# Altium PCB pilotage moteur.PcbDoc
Units mil, origin at the board's own origin, x right, y up, seen from the top; angles counter-clockwise.
Board outline 2030 x 2485 mil, 2 copper layers (Top Layer, Bottom Layer); 17 components, 12 nets, 47 pads, 3 vias.
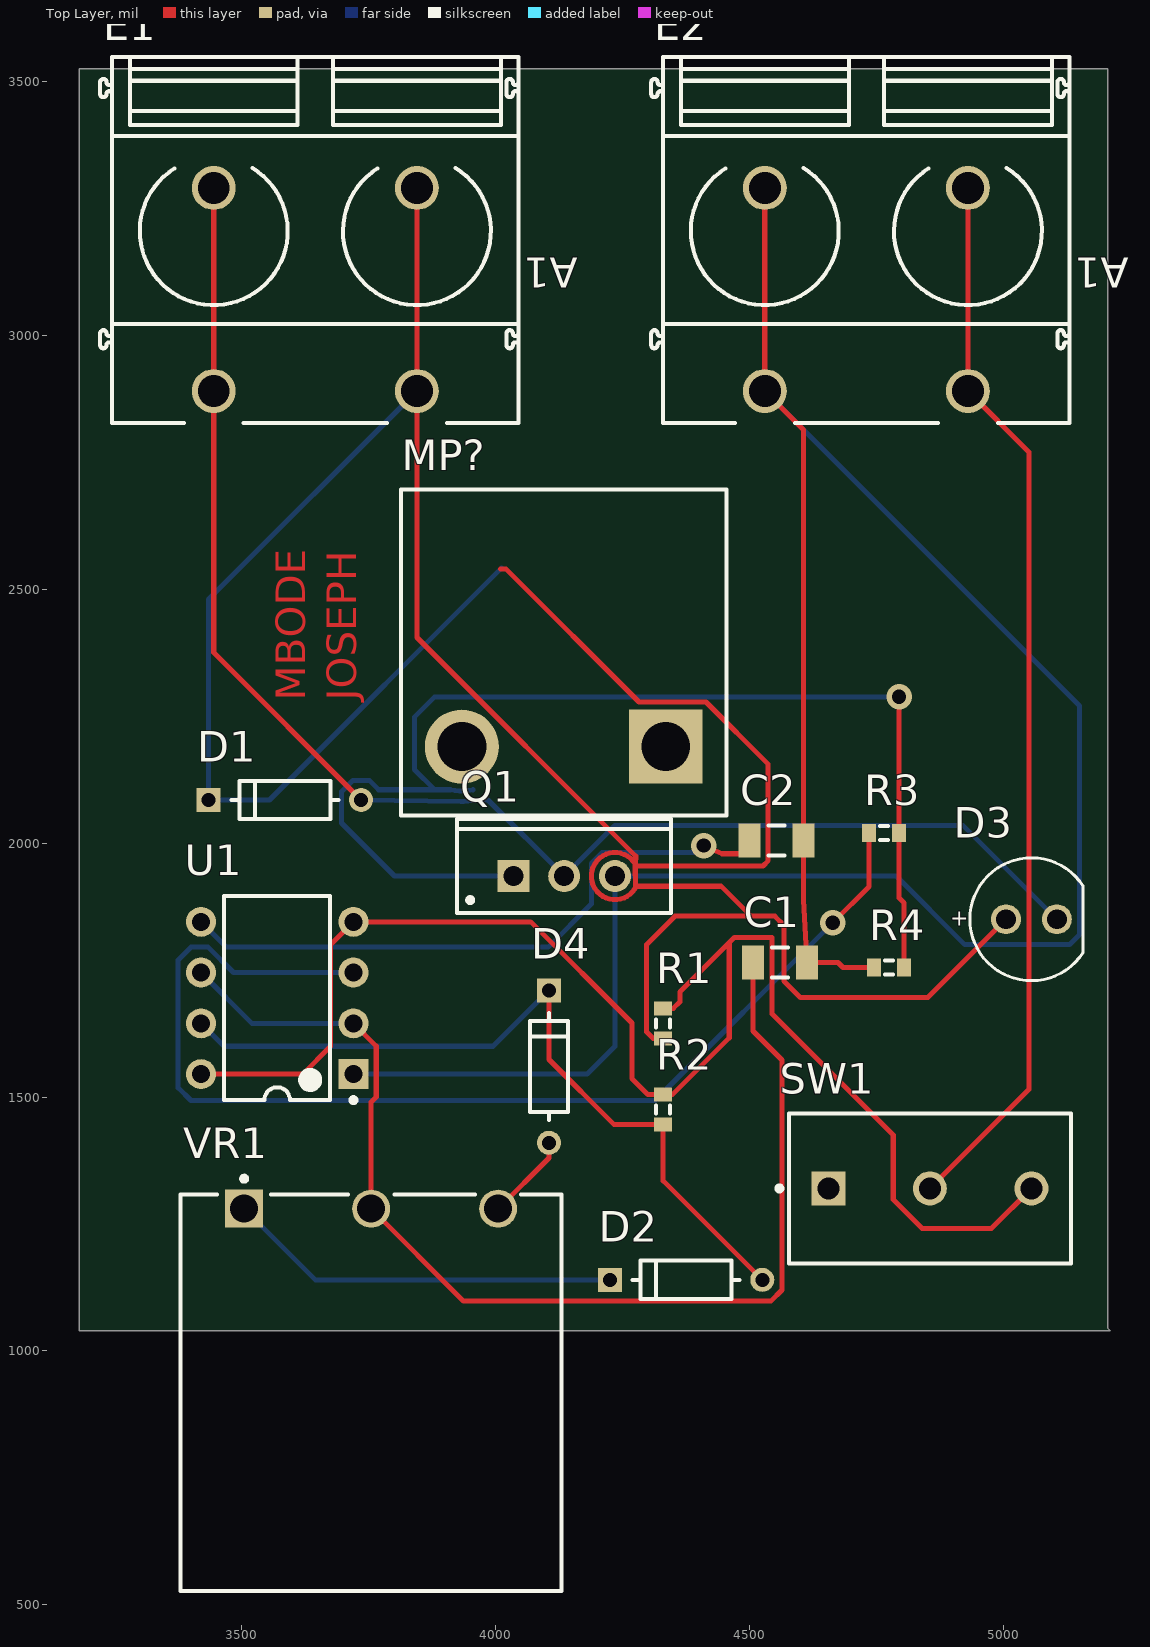
[diagram p0: Top Layer view]
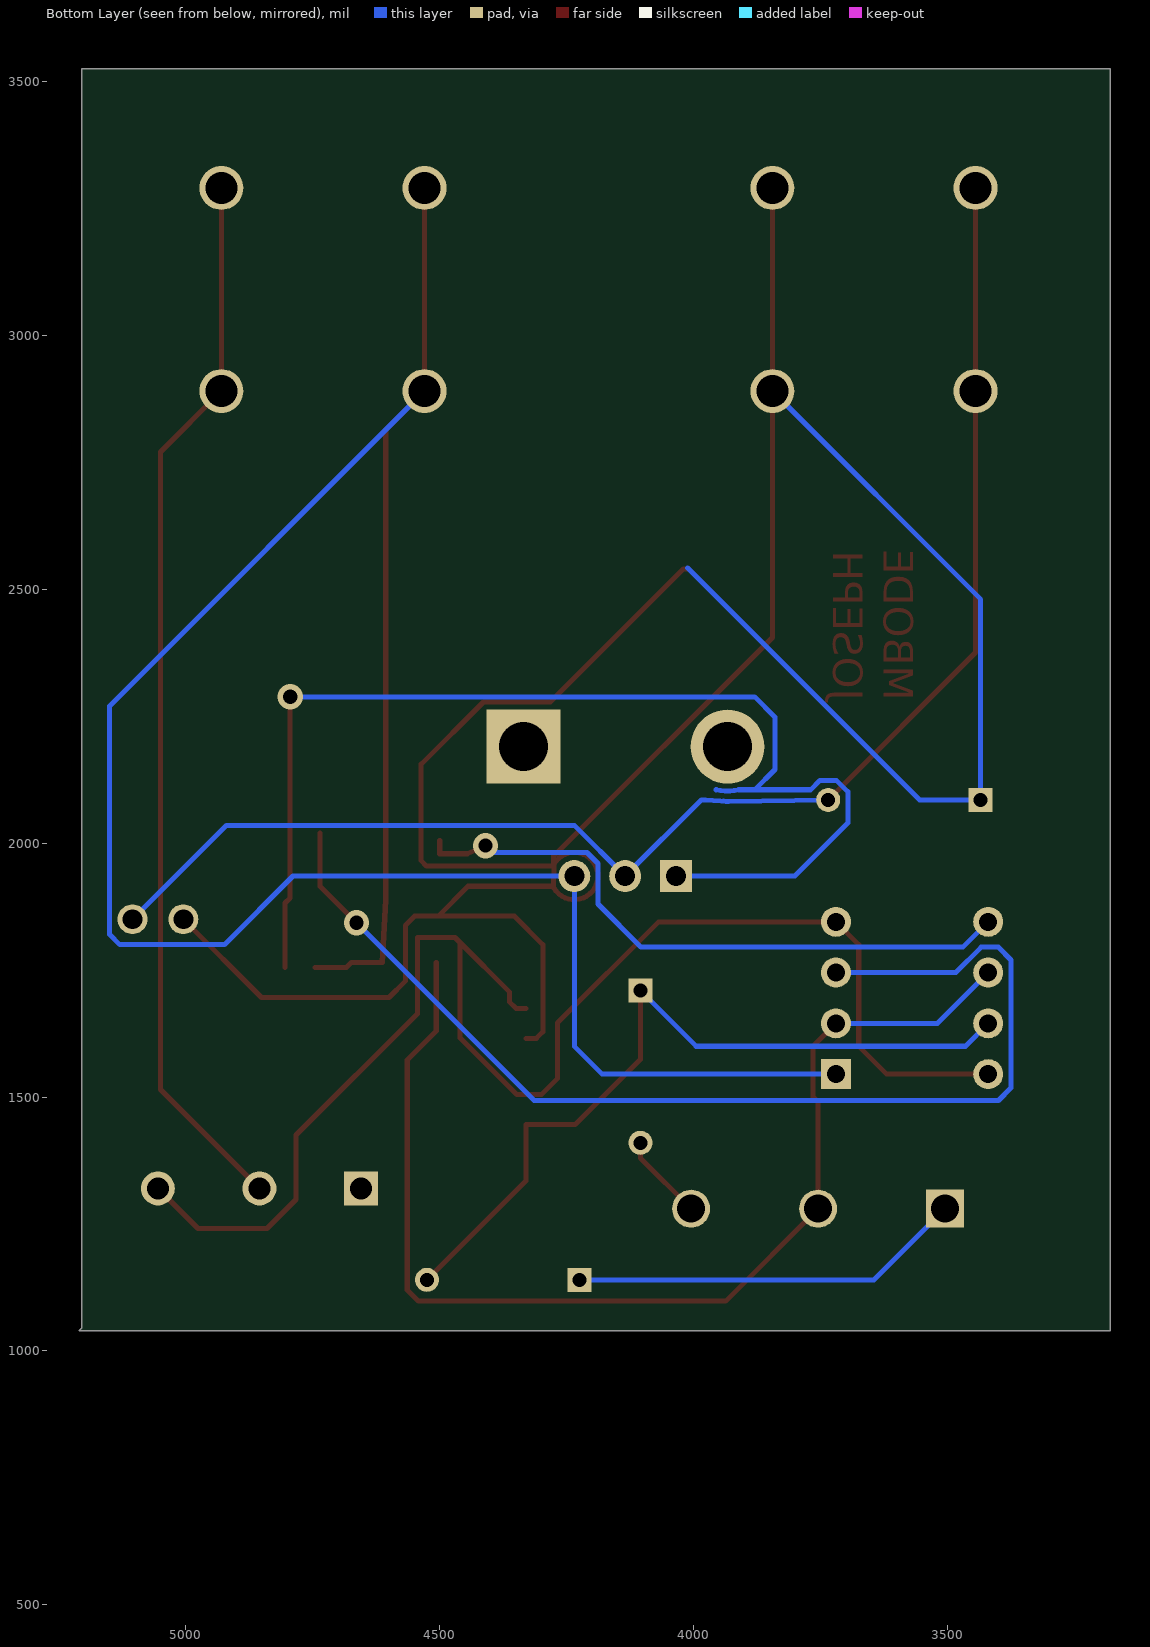
[diagram p1: Bottom Layer view, seen from below]

## Layer stack, top to bottom
Top Solder: solder mask 0.4, Solder Resist, Dk 3.5
Top Layer: signal copper 1.4
Dielectric 1: dielectric 12.6, FR-4, Dk 4.8
Bottom Layer: signal copper 1.4
Bottom Solder: solder mask 0.4, Solder Resist, Dk 3.5

## Board outline
3180,3525 5205,3525 5205,1045 5210,1040 3180,1040

## Design rules (kind name [scope] priority, off if disabled: settings)
Clearance [All] p1: gap=10 ignorepadtopadclearanceinfootprint=FALSE except(0: Arc-Hole Track-Hole SMDPad-Hole THPad-Hole Via-Hole Fill-Hole Poly-Hole Region-Hole Text-Hole)
PolygonConnect [All] p1: connectstyle=Relief reliefconductorwidth=10 reliefentries=4 polygonreliefangle="90 Angle" airgapwidth=10
RoutingVias [All] p1: holewidth=28 width=50 viastyle="Through Hole" minholewidth=28 minwidth=50 maxholewidth=28 maxwidth=50
SolderMaskExpansion [All] p1: expansion=4 istentingtop=FALSE
Width [All] p1: maxlimit=10 minlimit=10 preferedwidth=10
30 further rules are at their usual default settings.

## Components (designator, comment, footprint, x,y, rotation, side; value= is the part's Value field where it differs from the comment)
C1 "Cap Semi" C1206 4560,1765 r180 top value=10nF
C2 "Cap Semi" C1206 4553.15,2005 r180 top value=0.1uF
D1 "1N4148" FP-017AG-MFG 3585,2085 r0 top
D2 "1N4148" FP-017AG-MFG 4375,1140 r0 top
D3 "151051BS04000" WL-TMRC_D5.9H8.7 5055,1850 r0 top
D4 "1N4148" FP-017AG-MFG 4105,1560 r270 top
E1 "1934140000" LU_10_16_90_02 3645,3187.24 r180 top
E2 "1934140000" LU_10_16_90_02 4730,3187.24 r180 top
MP? "E2A-T220-25E" FP-E2A-T220-25E-MFG 4134.21,2375.04 r270 top
Q1 "NMOS-2" TO-220AB 4135,1935 r0 top
R1 "Res3" J1-0603 4330,1645 r90 top value=200R
R2 "Res3" J1-0603 4330,1475 r90 top value=1K
R3 "Res3" J1-0603 4765,2020 r180 top value=1K
R4 "Res3" J1-0603 4775,1755 r0 top value=1K
SW1 "25439NAH" FP-25439NAH-MFG 4855,1320 r0 top
U1 "NE555P" P0008A 3570,1695 r180 top
VR1 "pot" BOUR-3852A-282-103AL-3_V 3755,1280 r0 top

## Footprints (in the part's own frame and the unit in brackets; to place one, negate y for a bottom-side part, rotate by r counter-clockwise, add the part's x,y. Pads: shape width x height; smd on the part's side, far side on the other; paste and mask are expansions set on the pad)
BOUR-3852A-282-103AL-3_V [mm] "TH, 3-Leads, Body 19.81x19.05mm, Pitch 6.35mm"
  rect 1.9x1.9 hole 1.4: 1(-6.35,0)
  round 1.9 hole 1.4: 2(0,0) 3(6.35,0)
  silkscreen extent -9.53,-19.11 9.53,1.62, body extent -9.52,-19.11 9.52,0.7, height 19.05
C1206 [mm] "Chip Capacitor, Body 3.2x1.6mm, IPC High Density"
  rect 1.1x1.7 smd: 1(-1.35,0) 2(1.35,0)
  silkscreen extent -0.4,-0.75 0.4,0.75, body extent -1.7,-0.9 1.7,0.9, height 1.3
FP-017AG-MFG [mm]
  rect 1.2x1.2 hole 0.7 paste-1000 mask+0: 1(-3.813,0)
  round 1.2 hole 0.7 paste-1000 mask+0: 2(3.813,0)
  silkscreen extent -2.68,-0.95 2.68,0.95, body extent -4.51,-1.05 4.51,1.05, height 0.25
FP-25439NAH-MFG [mm]
  rect 1.7x1.7 hole 1.1 paste-1000 mask+0: 1(-5.08,0)
  round 1.7 hole 1.1 paste-1000 mask+0: 2(0,0) 3(5.08,0)
  silkscreen extent -7.65,-3.75 7.05,3.75, body extent -7.15,-3.85 7.15,3.85, height 0.25
FP-E2A-T220-25E-MFG [mm]
  rect 3.7x3.7 hole 2.45 paste-1000 mask+0: 1(4.7,5.1)
  round 3.7 hole 2.45 paste-1000 mask+0: 2(4.7,-5.1)
  silkscreen extent -8.15,-8.15 8.15,8.15, body extent -8.25,-8.25 8.25,8.25, height 0.25
J1-0603 [mm] "Chip Resistor, Body 1.6x0.8mm, IPC High Density"
  rect 0.7x0.9 smd: 1(-0.75,0) 2(0.75,0)
  silkscreen extent -0.2,-0.35 0.2,0.35, body extent -0.85,-0.48 0.85,0.48, height 0.9
LU_10_16_90_02 [mm] "OMNIMATE Power - Serie LU  LU 10.16/02/90 4.5"
  round 2.2 hole 1.6: A1(-5.08,7.55) A1(-5.08,-2.61) A2(5.08,7.55) A2(5.08,-2.61)
  silkscreen extent -10.16,-9.15 10.76,9.15, body extent -10.16,-9.15 10.76,9.15, height 28.51
P0008A [mm] "DIP, 8-Leads, Body 10.15x6.6mm, Pitch 2.54mm"
  rect 1.5x1.5 hole 0.9: 1(-3.81,3.81)
  round 1.5 hole 0.9: 2(-3.81,1.27) 3(-3.81,-1.27) 4(-3.81,-3.81) 5(3.81,-3.81) 6(3.81,-1.27) 7(3.81,1.27) 8(3.81,3.81)
  silkscreen extent -3.94,-5.1 2.65,5.23, body extent -3.95,-5.07 3.95,5.07, height 5.08
TO-220AB [mm] "TO, Thru-Hole, Vertical, Heatsink Mounted; 3 In-Line Leads; Pitch 2.54 mm"
  rect 1.6x1.6 hole 1: 1(-2.54,0)
  round 1.6 hole 1: 2(0,0) 3(2.54,0)
  silkscreen extent -5.35,-1.85 5.35,2.85, body extent -5.4,-1.9 5.4,2.9, height 19.3
WL-TMRC_D5.9H8.7 [mm] "THT Mono-color Round Color LED, 2-leads"
  round 1.5 hole 1: 1(-1.27,0) 2(1.27,0)
  silkscreen extent -3.07,-3.07 2.58,3.08, body extent -2.95,-2.95 2.45,2.95, height 9.2

## Part data
C1 C2: "Capacitor (Semiconductor SIM Model)", LatestRevisionDate=29-May-2009, LatestRevisionNote="IPC-7351 Footprint Added.", PackageDescription="Chip Capacitor", PackageReference=C1206, Published=8-Jun-2000, Publisher="Altium Limited"
D1 D2 D4: library part CMP-07163-000046-1, "DIODE GEN PURP 100V 200MA DO35", Average Rectified Current=200mA, Capacitance=4pF, Case/Package=DO-35, Current=4A, Forward Current=300mA, Forward Voltage=1V, Max Forward Surge Current (Ifsm)=1A, Max Operating Temperature=175°C, Max Power Dissipation=500mW, Max Repetitive Reverse Voltage (Vrrm)=100V, Max Reverse Current=5uA, Min Operating Temperature=-65°C, Package Quantity=2000, Contact Plating=Tin, Current Rating=200mA, Diameter=1.91mm, Element Configuration=Single, Height=4.56mm, Lead Free="Lead Free", Length=4.56mm, Max Reverse Voltage (DC)=100V, Max Surge Current=4A, Mount="Through Hole", Number of Pins=2, Output Current=200mA, Outside Diameter=1.85mm, Packaging=Bulk, Peak Non-Repetitive Surge Current=4A, Polarity=Standard, Power Dissipation=500mW, Radiation Hardening=No, REACH SVHC="No SVHC", Recovery Time=4ns, Reverse Recovery Time=4ns, Reverse Voltage=100V, Series=-, Voltage=100V, Voltage Rating (DC)=100V, Weight=0.01lb, Width=1.91mm
D3: library part CMP-1488-00009-2, Case/Package=Radial, Color=Blue, Forward Current=100mA, Forward Voltage=3.2V, Max Operating Temperature=85°C, Max Reverse Voltage (DC)=5V, Min Operating Temperature=-40°C, Test Current=20mA, Dominant Wavelength=470nm, Height=8.6mm, Length=5mm, Lens Size=5mm, Lens Style="Circular, Diffused, Round", Luminous Intensity=500mcd, Mount="Through Hole", NexarPartId=29717812, Packaging=Bulk, Peak Wavelength=465nm, REACH SVHC=Unknown, RoHS=Compliant, Viewing Angle=40°, Wavelength=470nm, Width=5mm
E1 E2: library part CMP-1560-00480-1, "OMNIMATE Power - series LU", Colour=Black, Manufacturer=Weidmueller, Rated_current_use_group_B_UL_1059="65 A", Rated_voltage_for_surge_voltage_class_pollution_degree_II_2="1000 V", Rated_voltage_use_group_B_UL_1059="300 V", UL_94_flammability_rating=V-0, ComponentLink1Description="Manufacturer URL", ComponentLink1URL=http://www.weidmueller.com/, ComponentLink2Description="URL Link1", ComponentLink2URL=http://catalog.weidmueller.com/catalog/Start.do?localeId=en&ObjectID=1934140000, Contact_material=E-Cu, Contact_surface=tinned, Insulating_material="Wemid (PA)", Mounting_onto_the_PCB="Solder connection", No_of_poles=2, PackageReference=LU_10_16_90_02, Packaging=Box, PartNumber=1934140000, Pitch_inch="0,4 inch", Pitch_mm="10,16 mm", Qty="20 PCS", Revision=V1, Short_text_for_material="LU 10.16/02/90 4.5SN BK BX", Side_termination_characteristic="closed side", Solder_pin_length_mm="4,5 mm", Solid_max_H05_07_V_U="16 mm²", Solid_min_H05_07_V_U="0,5 mm²", Wire_cross_section_AWG_max_UL_1059="AWG 6", Wire_cross_section_AWG_min_UL_1059="AWG 26"
MP?: library part CMP-33535-000011-1, "BLACK ANODIZED HEATSINK", Natural Thermal Resistance=16.4°C/W, Package Cooled=TO-220, Thermal Resistance @ Forced Air Flow (100 LFM)=4°C/W, Material=Aluminium, Mount=Bolt, RoHS Compliant=Yes, Shape=Fins
Q1: "N-Channel Power MOSFET", ComponentLink1Description="Manufacturer Link", ComponentLink1URL=http://www.irf.com/, DatasheetVersion=PD-9.814, LatestRevisionDate=17-Jul-2002, LatestRevisionNote="Re-released for DXP Platform.", Note="Pin 2 is electrically connected to pin 4.", PackageDescription="TO, Thru-Hole, Vertical, Heatsink Mounted; 3 In-Line Leads; Pitch 2.54 mm", PackageReference=TO-220AB, PackageVersion=Feb-1997, Published=8-Jun-2000, Publisher="Altium Limited"
R1 R2 R3 R4: "Resistor", LatestRevisionDate=29-May-2009, LatestRevisionNote="IPC-7351 Footprint Added.", PackageDescription="Chip Resistor", PackageReference=J1-0603, Published=8-Jun-2000, Publisher="Altium Limited"
SW1: library part CMP-47022-000003-1, "SWITCH SLIDE SPDT 4A 125V", Contact Resistance=10mR, Current Rating=1A, Max Operating Temperature=85°C, Max Voltage Rating (AC)=250V, Max Voltage Rating (DC)=30V, Min Operating Temperature=-40°C, Package Quantity=100, Voltage Rating (AC)=125V, Actuator Length=2.8mm, Actuator Material=Nylon, Actuator Type=Standard, Contact Material=Silver, Electrical Life=10000Cycles, Mechanical Life=20000Cycles, Mount="Through Hole", Orientation=Straight, Packaging=Bulk, REACH SVHC="No SVHC", RoHS Compliant=No, Series=25000N, Switch Function=On-Off-On, Switch Travel=4mm, Termination="PC Pin", Throw Configuration=SPDT, Voltage Rating (DC)=30V
U1: library part CMP-2000-04954-1, "Precision Timer, 4.5 to 16 V, 0 to 70 degC, 8-Pin DIP, Pb-Free, Tube", Manufacturer=TexasInstruments, Maximum High Level Output Current=-200mA, Maximum Low Level Output Current=200mA, Operating Supply Voltage=5, Package=8PDIP, Package Description="8-Pin Double In-line Package, Body 9.59 x 6.35 mm, Pitch 2.54 mm", Package Reference=P8, Category=Timer, Datasheet URL=http://www.ti.com/general/docs/lit/getliterature.tsp?genericPartNumber=NE555&fileType=pdf, Datasheet Version="Rev. I, 09/2014", Manufacturer URL=http://www.ti.com/, Number of Internal Timers=1, Package URL=http://www.ti.com/lit/ml/mpdi001b/mpdi001b.pdf, Packaging=Rail/Tube, Rad Hard=No, Type=Standard
VR1: library part CMP-2000-05079-1, "Diameter Panel Control, 10 KOhm, +/- 10%, 2 W, -1 to 125 degC, 3-Pin THD, RoHS, Bulk", Manufacturer=Bourns, Power (Watts)=2W, Resistance (Ohms)=100k, Resistive Material=Cermet, Standard Package=45, Temperature Coefficient=±150ppm/degC, Tolerance=±10%, Actuator Diameter="0.250\"(6.35mm)", Actuator Length="0.875\"(22.23mm)", Actuator Type=Slotted, Associated Product="36-8560-ND / -KNOBINSTRUMW/DIALRND.9\"DIA / 36-8555-ND / -KNOBINSTRUMSKIRTEDRND.7\"DIA / 36-8556-ND / -KNOBINSTRUMSKIRTEDRND.9\"DIA / 36-8565-ND / -KNOBINSTRUMDBLBARRND.7\"DIA / 36-8566-ND / -KNOBINSTRUMDBLBARRND.9\"DIA / 36-8568-ND / -KNOBINSTRUMSGLBARRND.7\"DIA / 36-8569-ND / -KNOBINSTRUMSGLBARRND.9\"DIA / 36-8559-ND / -KNOBINSTRUMW/DIALRND.7\"DIA / 226-1006-ND / -KNOBBLKGLOSS.75\"DIA.250\"SHAFT / 226-1007-ND / -KNOBBLKGLOSS.925\"DIA.250\"SHAFT / 226-1011-ND / -KNOBBLKGLOS", Built in Switch=None, Bushing Thread=3/8-32, Catalog Drawings="3852SeriesSide1 /  / 3852SeriesSide2", Category=Potentiometers,VariableResistors, Datasheet URL=https://datasheet.ciiva.com/11831/0900766b80f93b4b-11831016.pdf, Datasheet Version=Sep-14, Family=RotaryPotentiometers,Rheostats, Manufacturer URL=http://www.bourns.com/, Mounting Type=PanelMount, Number of Gangs=1, Number of Turns=1, Online Catalog=3852and3856Series, Other Names=3852A282103AL, Packaging=Bulk, PCN Design/Specification=PBTResinJun/2011, PCN Other=MultipleChanges01/Dec/2012, RoHS Information=3852A-LMaterialDeclaration, Rotation=280deg, Series=3852, Taper=Linear, Termination Style=SolderLug

## Via types
v1: diameter 50, hole 28, Top Layer to Bottom Layer, 3 vias

## Nets (pads, with @x,y where several pads share a name; then routed paths per layer and width w, separated by ;. In a path a pad name is that pad's centre, name@x,y a point inside that pad or via, vN(x,y) a via of type N, cw(c..) or ccw(c..) an arc to the next point about the centre after c; other vN are vias at no path point)
+9V: E2.A1 SW1.2 | length 2100.5
  Top Layer w10: SW1.2 5050,1515 5050,2770 4930,2890 E2.A1@4930,3290
GND: C1.1 C2.1 E2.A2 Q1.3 R4.1 U1.1 | length 4872.1
  Top Layer w10: E2.A2@4530,3290 4530,2890 4606.3,2813.7 C2.1 4606.3,1887.85 C1.1 4674,1765 4684,1755 R4.1
  Bottom Layer w10: U1.1 4180,1545 4235,1600 Q1.3 4789,1935 4924,1800 5130,1800 5150,1820 5150,2270 E2.A2@4530,2890
NetC1_2: C1.2 U1.2 U1.6 VR1.2 | length 2291.4
  Top Layer w10: U1.2 3765,1600 3765,1500 3755,1490 VR1.2 3937,1098 4542,1098 4564,1120 4564,1573 4506.85,1630.15 C1.2
  Bottom Layer w10: U1.6 3520,1645 U1.2
NetC2_2: C2.2 U1.5 | length 1259.8
  Top Layer w10: v1(4410,1995) 4445.9,1979 4500,1979 C2.2
  Bottom Layer w10: U1.5 3470,1795 4103.5,1795 4188.5,1880 4188.5,1960 4210,1981.5 4396.5,1981.5 v1(4410,1995)
NetD1_1: D1.1 D3.1 E1.A1 R1.1 | length 6072.7
  Top Layer w10: E1.A1@3845,3290 3845,2890 3845,2405 4276,1974 4275.8,1957.93 ; 4010,2540 4020,2540 4282.17,2277.83 4414.05,2277.83 4536.65,2155.23 4536.65,1965.32 4526.33,1955 4278.73,1955 4275.8,1957.93 ; 4274.96,1911.23 cw(c4235,1935) 4274.96,1958.77 ; R1.1 4310,1615.47 4297,1628.47 4297,1800 4353,1856 4503.14,1856 ; D3.1 4851,1696 4600,1696 4567.82,1728.18 4567.82,1837.78 4549.6,1856 4503.14,1856 ; 4274.96,1958.77 4275.8,1957.93 ; 4274.96,1958.77 4275.78,1912.05 4278.73,1915 4444.14,1915 4503.14,1856
  Bottom Layer w10: E1.A1@3845,2890 3434.88,2479.88 D1.1 3555,2085 4011.95,2541.95
NetD1_2: D1.2 D3.2 E1.A2 Q1.2 | length 2884.6
  Top Layer w10: E1.A2@3445,3290 3445,2890 3445,2375.12 D1.2
  Bottom Layer w10: D1.2 3931.88,2082.18 ; 3941.16,2082.44 cw(c3933.43,2190) 3931.88,2082.18 ; D3.2 4920.01,2035 4235,2035 Q1.2 3985,2085 3976.72,2085 3931.88,2082.18
NetD2_1: D2.1 VR1.1 | length 777.9
  Bottom Layer w10: VR1.1 3645,1140 D2.1
NetD2_2: D2.2 D4.1 R2.1 U1.7 | length 1549.9
  Top Layer w10: D4.1 4105,1574 4233.53,1445.47 R2.1 4330,1335.12 D2.2
  Bottom Layer w10: U1.7 3465,1600 3994.88,1600 D4.1
NetD4_2: D4.2 VR1.3 | length 171.3
  Top Layer w10: VR1.3 4105,1380 D4.2
NetQ1_1: Q1.1 R3.1 R4.2 | length 2387.7
  Top Layer w10: v1(4794.53,2288) R3.1 4794.53,1892 4804.53,1882 R4.2
  Bottom Layer w10: 3955.56,2105 cw(c3933.43,2190) 3911.29,2105 3880,2105 ; Q1.1 3801,1935 3696.5,2039.5 3696.5,2101 3719.12,2123.62 3751.12,2123.62 3769.74,2105 3880,2105 ; v1(4794.53,2288) 3880,2288 3840,2248 3840,2145 3880,2105
NetR1_2: R1.2 R2.2 SW1.3 U1.4 U1.8 | length 2946.9
  Top Layer w10: U1.8 3620,1545 3675,1600 3675,1800 U1.4 4069,1845 4268.47,1645.53 4268.47,1536.06 4300,1504.53 R2.2 4348,1504.53 4460,1616.53 4460,1804 ; R1.2 4350,1674.53 4363,1687.53 4363,1707 4460,1804 ; SW1.3 4976,1241 4840,1241 4783,1298 4783,1425 4544,1664 4544,1814 4470,1814 4460,1804
NetR3_2: R3.2 U1.3 | length 2279
  Top Layer w10: v1(4664,1843) 4735.47,1914.47 R3.2
  Bottom Layer w10: U1.3 3484,1745 3434,1795 3400,1795 3375,1770 3375,1518 3400,1493 4314,1493 v1(4664,1843)
pads on no net: MP?.1 MP?.2 SW1.1

## Other copper
Top Layer:
  text "MBODE  / JOSEPH" at 3745,2280 h100 r90

## Text inside footprints (layer, text, board x,y; h text height)
D3: Top Overlay "+" at 4895.55,1837.01 h31.5
E1: Top Overlay "A1" at 4161.93,3152.8 h59.06 r180
E2: Top Overlay "A1" at 5246.93,3152.8 h59.06 r180